# Altium PCB PCB1.PcbDoc
Units mm, origin at the board's own origin, x right, y up, seen from the top; angles counter-clockwise.
Board outline 44.96 x 16.26 mm, 2 copper layers (Top Layer, Bottom Layer); 18 components, 8 nets, 40 pads, 0 vias.
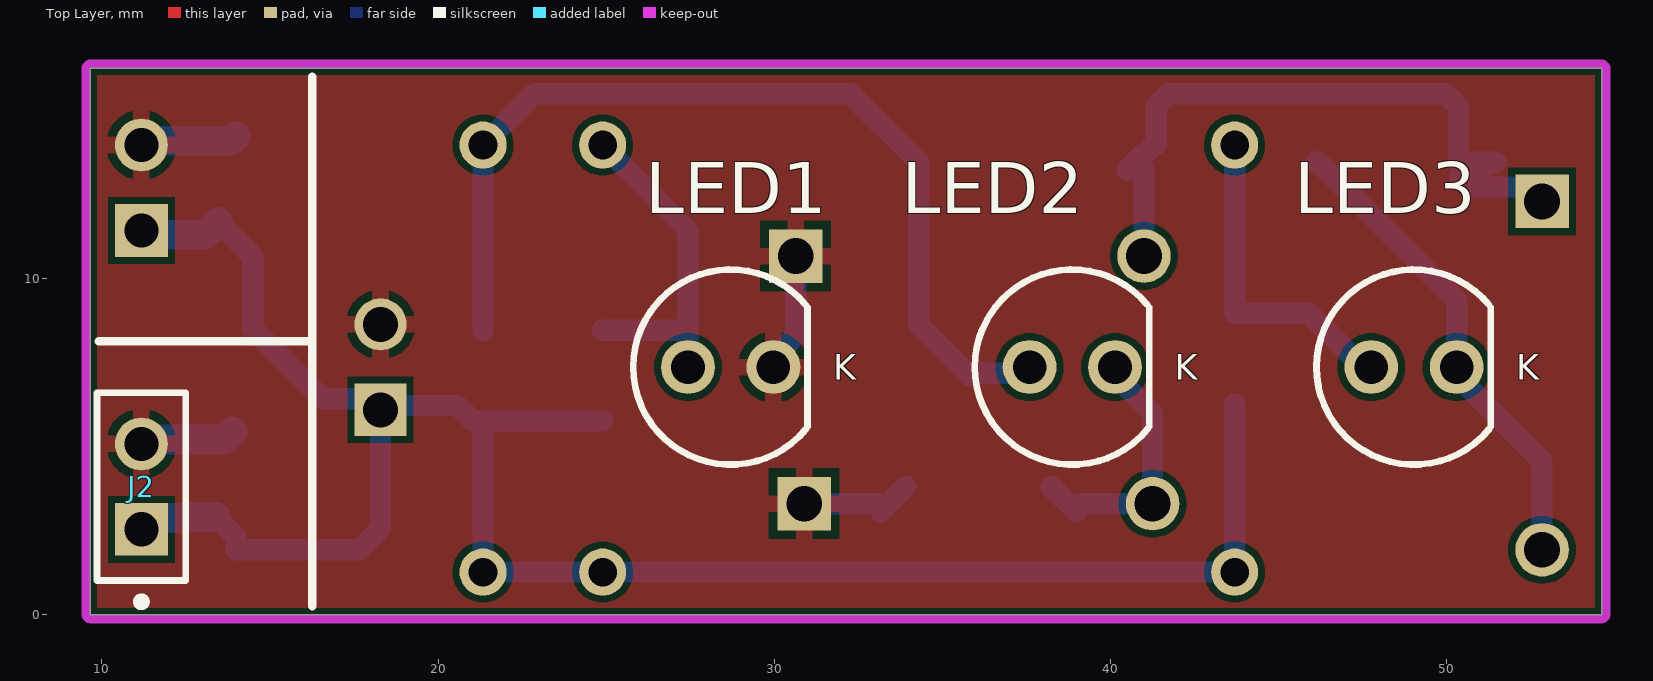
[diagram p0: Top Layer view]
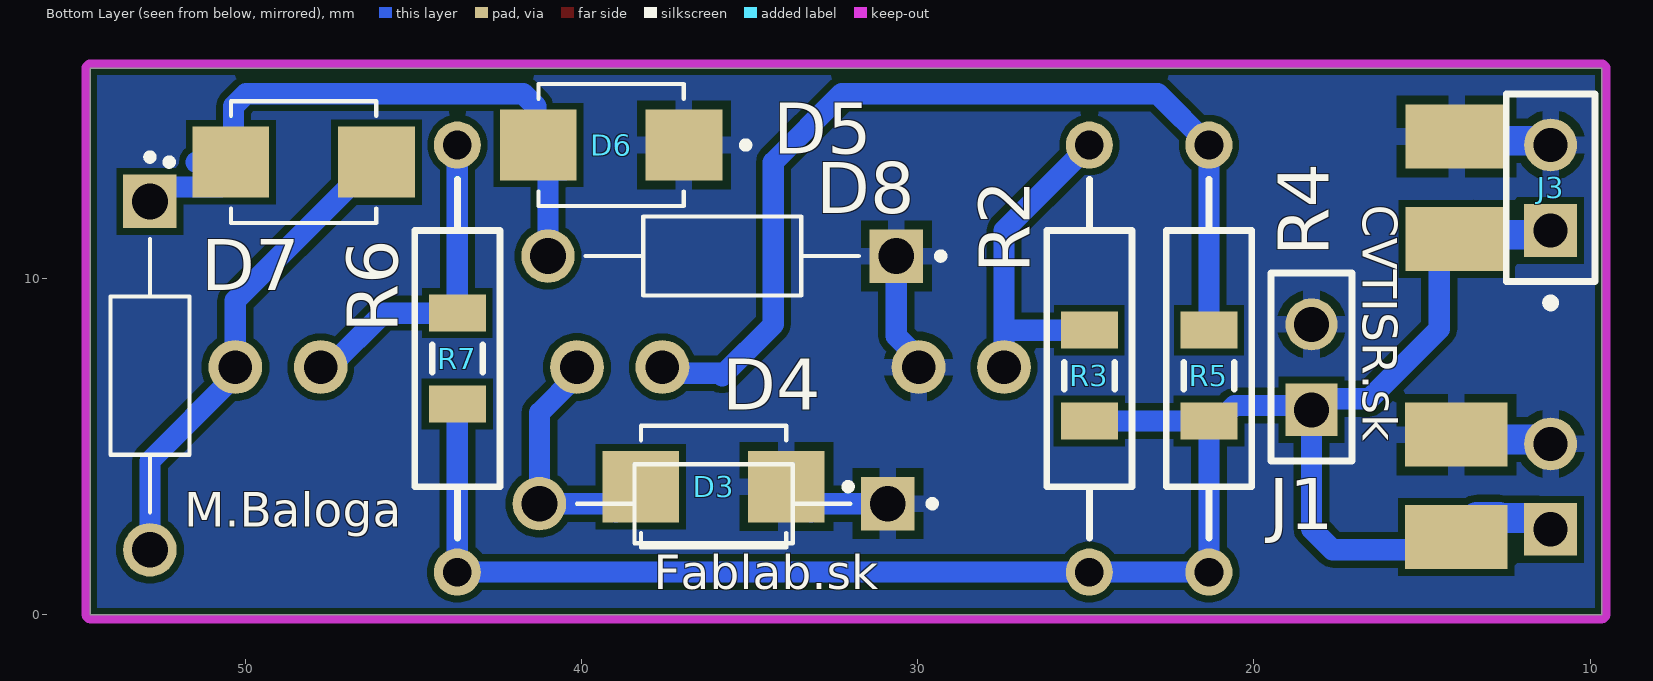
[diagram p1: Bottom Layer view, seen from below]
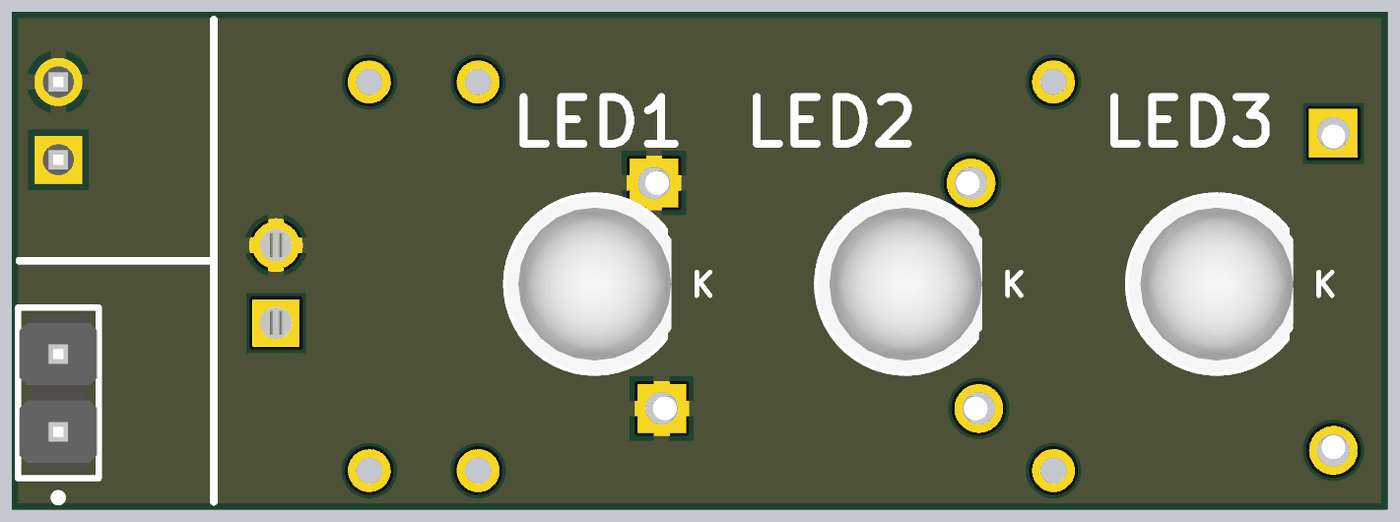
[diagram p2: 3D render of the assembled board from above, using the file's embedded part models]
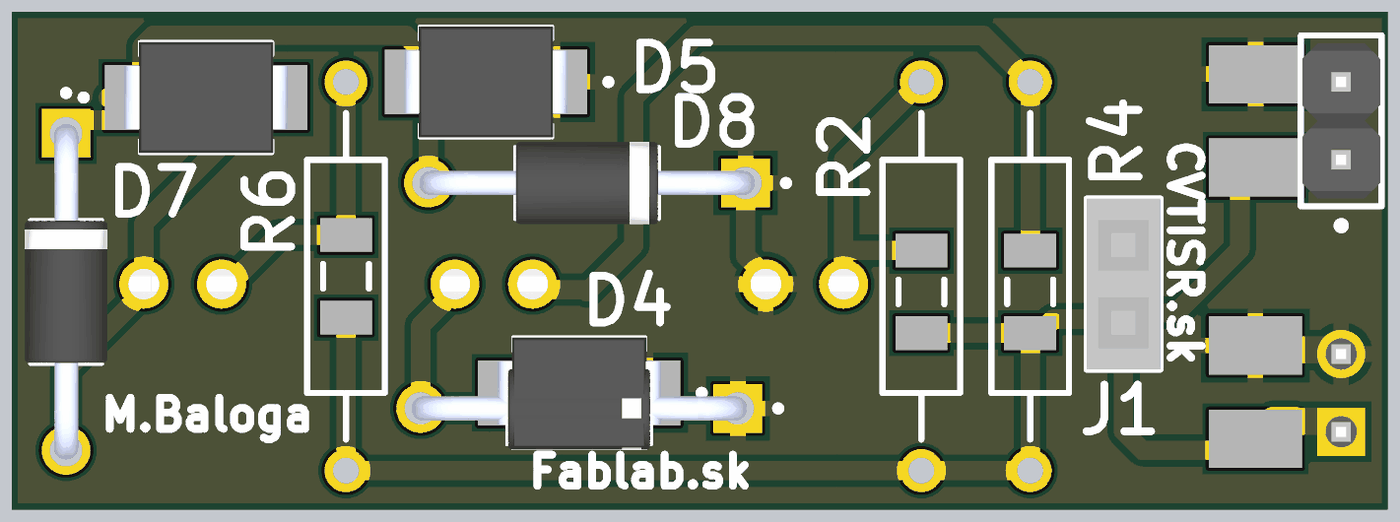
[diagram p3: 3D render of the assembled board from below, using the file's embedded part models]

## Layer stack, top to bottom
Top Solder: solder mask 0.0102, Solder Resist, Dk 3.5
Top Layer: signal copper 0.0356
Dielectric 1: dielectric 0.32, FR-4, Dk 4.8
Bottom Layer: signal copper 0.0356
Bottom Solder: solder mask 0.0102, Solder Resist, Dk 3.5

## Board outline
9.652,0 54.61,0 54.61,16.256 9.652,16.256

## Design rules (kind name [scope] priority, off if disabled: settings)
BoardOutlineClearance [All] p1: gap=0.2 ignorepadtopadclearanceinfootprint=FALSE except(0.4: Arc-SplitBarrior Arc-SplitContinuation Track-SplitBarrior Track-SplitContinuation SMDPad-SplitBarrior SMDPad-SplitContinuation THPad-SplitBarrior THPad-SplitContinuation Via-SplitBarrior Via-SplitContinuation Fill-SplitBarrior Fill-SplitContinuation Poly-SplitBarrior Poly-SplitContinuation Region-SplitBarrior Region-SplitContinuation Text-SplitBarrior Text-SplitContinuation)
Clearance "Clearance Bottom Layer" [OnLayer('Bottom Layer')] p1: gap=0.203 ignorepadtopadclearanceinfootprint=TRUE except(0.254: Arc-Text Track-Text SMDPad-Text THPad-Text Via-Text Fill-Text Poly-Text Region-Text Text-Text)
Clearance "Clearance Top Layer" [OnLayer('Top Layer')] p2: gap=0.203 ignorepadtopadclearanceinfootprint=TRUE except(0.254: Arc-Text Track-Text SMDPad-Text THPad-Text Via-Text Fill-Text Poly-Text Region-Text Text-Text)
Clearance [All] p3: gap=0.2 ignorepadtopadclearanceinfootprint=FALSE except(0.089: Arc-Arc Arc-Track Arc-SMDPad Track-Track Track-SMDPad SMDPad-SMDPad; 0.127: Arc-Via Track-Via SMDPad-Via THPad-Via Via-Via; 0.254: Arc-Text Track-Text SMDPad-Text THPad-Text Via-Text Fill-Text Poly-Text Region-Text Text-Text)
HoleSize [All] p1: absolutevalues=TRUE maxlimit=6.3 minlimit=0.2 maxpercent=80.000 minpercent=20.000
MinimumAnnularRing [All] p1: minimumring=0.076
MinimumSolderMaskSliver [All] p1: minsoldermaskwidth=0.1
PolygonConnect PolygonConnect_1 [All] p1: thpad.connectstyle=Relief thpad.reliefconductorwidth=0.508 thpad.reliefentries=4 thpad.polygonreliefangle="90 Angle" thpad.airgapwidth=0.254 smdpad.connectstyle=Relief smdpad.reliefconductorwidth=0.508 smdpad.reliefentries=4 smdpad.polygonreliefangle="90 Angle" smdpad.airgapwidth=0.254 via.connectstyle=Direct via.reliefconductorwidth=0.508 via.reliefentries=4 via.polygonreliefangle="90 Angle" via.airgapwidth=0.254
RoutingCorners [All] p1: cornerstyle=Round minsetback=2.54 maxsetback=2.54
RoutingVias [All] p1: holewidth=0.5 width=1 viastyle="Through Hole" minholewidth=0.2 minwidth=0.45 maxholewidth=1 maxwidth=2
SilkToSilkClearance [All] p1: silktosilkclearance=0.1
SilkToSolderMaskClearance [IsPad] p1: minsilkscreentomaskgap=0.1 clearancetoexposedcopper=TRUE
SolderMaskExpansion [All] p1: expansion=0.102 istentingtop=FALSE
Width [All] p1: maxlimit=2.54 minlimit=0.089 preferedwidth=0.381
25 further rules are at their usual default settings.

## Components (designator, comment, footprint, x,y, rotation, side; value= is the part's Value field where it differs from the comment)
D3 "S1BB" DIOM4336X265N 36.068,3.81 r0 bottom
D4 "1N4007G" DIOAD1036W78L470D235 36.068,3.302 r0 bottom
D5 "S1BB" DIOM4336X265N 48.26,13.462 r180 bottom
D6 "S1BB" DIOM4336X265N 39.116,13.97 r0 bottom
D7 "1N4007G" DIOAD1036W78L470D235 52.832,7.112 r270 bottom
D8 "1N4007G" DIOAD1036W78L470D235 35.814,10.668 r0 bottom
J1 "SSW-102-02-G-S" SMTC-SSW-102-02-X-S 18.288,6.096 r90 bottom
J2 "M20-9990246" FP-M20-9990246-MFG 11.176,3.81 r90 top
J3 "M20-9990246" FP-M20-9990246-MFG 11.176,12.7 r90 bottom
LED1 "151051RS11000" "Type 5mm" 28.702,7.366 r0 top
LED2 "151051RS11000" "Type 5mm" 38.862,7.366 r0 top
LED3 "151051RS11000" "Type 5mm" 49.022,7.366 r0 top
R2 "Res2" AXIAL-0.5 24.892,7.62 r90 bottom value=1K
R3 "Res2" C1206 24.892,7.112 r90 bottom value=1K
R4 "Res2" AXIAL-0.5 21.336,7.62 r90 bottom value=1K
R5 "Res2" C1206 21.336,7.112 r90 bottom value=1K
R6 "Res2" AXIAL-0.5 43.688,7.62 r90 bottom value=1K
R7 "Res2" C1206 43.688,7.62 r90 bottom value=1K

## Footprints (in the part's own frame and the unit in brackets; to place one, negate y for a bottom-side part, rotate by r counter-clockwise, add the part's x,y. Pads: shape width x height; smd on the part's side, far side on the other; paste and mask are expansions set on the pad)
AXIAL-0.5 [mm] "Axial Device, Thru-Hole; 2 Leads; 0.5 in Pin Spacing"
  round 1.4 hole 0.85: 1(-6.35,0) 2(6.35,0)
  silkscreen extent -5.33,-1.27 5.33,1.27
C1206 [mm] "Chip Capacitor, Body 3.2x1.6mm, IPC High Density"
  rect 1.1x1.7 smd: 1(-1.35,0) 2(1.35,0)
  silkscreen extent -0.4,-0.75 0.4,0.75, body extent -1.7,-0.9 1.7,0.9, height 1.3
DIOAD1036W78L470D235 [mm]
  round 1.59 hole 1.06: A(5.18,0)
  rect 1.59x1.59 hole 1.06: C(-5.18,0)
  silkscreen extent -6.6,-1.17 4.07,1.17, body extent -5.47,-1.35 5.47,1.35, height 2.69
DIOM4336X265N [mm]
  rect 2.28x2.12 smd: A(2.165,0) C(-2.165,0)
  silkscreen extent -4.1,-1.81 2.16,1.81, body extent -2.67,-1.81 2.67,1.81, height 2.65
FP-M20-9990246-MFG [mm]
  rect 1.57x1.57 hole 1.02 paste-1000 mask+0: 1(-1.27,0)
  round 1.57 hole 1.02 paste-1000 mask+0: 2(1.27,0)
  silkscreen extent -3.55,-1.32 2.79,1.32, body extent -2.89,-1.42 2.89,1.42, height 0.25
SMTC-SSW-102-02-X-S [mm] "SQ Post Socket, 1x2 Pins, Vertical, 2.54mm Pitch, Female"
  rect 1.55x1.55 hole 1.04: 1(0,0)
  round 1.55 hole 1.04: 2(2.54,0)
  silkscreen extent -1.53,-1.2 4.07,1.2, body extent -1.52,-1.21 4.06,1.21, height 8.51
"Type 5mm" [mm] "THT, LED-5mm, 2pin- Body 5.8mm"
  round 1.6 hole 1: 1(1.27,0) 2(-1.27,0)
  silkscreen extent -2.9,-2.9 2.29,2.9, body extent -2.9,-2.9 2.5,2.9, height 11.7

## Part data
D3 D4 D5 D6 D7 D8: Package=None, Availability=Unavailable, Price=None
  D3 D5 D6: MF="{'manufacturer': u'Taiwan Semiconductor'}", MP=S1BB
  D4 D7 D8: MF="{'manufacturer': u'ON Semiconductor'}", MP=1N4007G
J1: library part CMP-1023-00324-1, "SQ Post Socket, Through-hole, Vertical, -55 to 125 degC, 2.54 mm Pitch, 2-Pin, Female, RoHS", Manufacturer=Samtec, Temperature Range="-55 to 125 degC", ComponentLink1Description="Manufacturer URL", ComponentLink1URL=http://www.samtec.com, ComponentLink2Description=Datasheet, ComponentLink2URL=http://www.samtec.com/documents/webfiles/pdf/SSW_TH.PDF, ComponentLink3Description="Package Specification", ComponentLink3URL=http://www.samtec.com/documents/webfiles/cpdf/SSW-1XX-XX-XXX-X-XX-XXX-XX-MKT.pdf, DatasheetVersion=F-214, Mounting Technology=Through-hole, Orientation=Vertical, PackageDescription="Assembly, Socket Strip .016 X .031 Tail", PackageReference=SSW-102-02-X-S, PackageVersion="CA, 6/1987", PartNumber=SSW-102-02-G-S, Pitch="2.54 mm", RoHS=True
J2 J3: library part CMP-15831-000009-1, "CONN HEADER VERT 2POS 2.54MM", Current Rating=3A, Manufacturer=Harwin, Temperature="-40°C to +105°C", Temperature Range High=+105°C, Temperature Range Low=-40°C, Automotive=No, Category=Conn, ComponentLink2Description=Datasheet, ComponentLink2URL=https://cdn.harwin.com/pdfs/M20-999.pdf, Conn Gender=Male, Conn Orientation=Vertical, Contact Material=Tin,Nickel, Device Class L1=Connectors, Device Class L2="Headers and Wire Housings", Device Class L3=unset, Digikey Description="CONN HEADER VERT 2POS 2.54MM", Height=8.99mm, Lead Free=Yes, Manufacturer Part Number=M20-9990246, Mouser Description="2.54mm (0.1\") Pitch SIL Vertical PC Tail Pin Header, 6.1mm mating pin height, tin, 2 contacts", Number Of Contacts=2, Number Of Rows=1, Octopart=https://octopart.com/m20-9990246-harwin-2590635, Package=M20-9990246, Pitch=2.54mm, RoHS=TRUE
LED1 LED2 LED3: library part CMP-1488-00008-1, "THT LED round mono-color color lens, WL-TMRW, Red", Emitting color=Red, Manufacturer="Wuerth Elektronik", ComponentLink1Description="Manufacturer URL", ComponentLink1URL=http://www.we-online.com, ComponentLink2Description=Datasheet, ComponentLink2URL=http://katalog.we-online.de/pbs/datasheet/7448042001.pdfhttp://katalog.we-online.de/pbs/datasheet/7448042001.pdfhttp://katalog.we-online.de/pbs/datasheet/7448042001.pdfhttp://katalog.we-online.de/pbs/datasheet/151051RS11000.pdf, PackageReference="Type 5mm", PartNumber=151051RS11000
R2 R3 R4 R5 R6 R7: "Resistor", LatestRevisionDate=17-Jul-2002, LatestRevisionNote="Re-released for DXP Platform.", PackageDescription="Axial Device, Thru-Hole; 2 Leads; 0.4 in Pin Spacing", PackageReference=AXIAL-0.4, Published=8-Jun-2000, Publisher="Altium Limited"

## Free pads (board coordinates)
  rect 3.048x1.905 smd far side: 5(13.97,11.176) 5(13.97,14.224) 5(13.98,2.311) 5(13.98,5.359)

## Nets (pads, with @x,y where several pads share a name; then routed paths per layer and width w, separated by ;. In a path a pad name is that pad's centre, name@x,y a point inside that pad or via, vN(x,y) a via of type N, cw(c..) or ccw(c..) an arc to the next point about the centre after c; other vN are vias at no path point)
GND: D3.C D4.C D6.C D8.C J1.2 J2.2 J3.2 LED1.1 pad.5@13.97,14.224 pad.5@13.98,5.359 | length 13
  Bottom Layer w0.635: pad.5@13.886,5.453 pad.5@13.98,5.359 ; LED1.1 29.972,7.627 30.634,8.289 D8.C ; D4.C 33.081,3.302 33.161,3.222 33.161,3.067 D3.C
  Bottom Layer w0.889: J2.2 11.306,5.21 13.643,5.21 pad.5@13.886,5.453 ; J3.2 11.303,14.097 13.843,14.097 pad.5@13.97,14.224
NetD3_A: D3.A D4.A LED2.1 | length 8
  Bottom Layer w0.635: D3.A 38.975,3.067 38.975,3.222 39.055,3.302 D4.A 41.248,6.004 40.132,7.12 LED2.1
NetD5_A: D5.A D7.A LED3.1 | length 14.4
  Bottom Layer w0.635: D5.A 46.175,13.462 50.292,9.345 LED3.1 50.292,7.112 52.832,4.572 D7.A
NetD5_C: D5.C D6.A D7.C D8.A | length 21.3
  Bottom Layer w0.635: D8.A 40.994,13.227 40.486,13.227 40.942,13.683 40.994,13.683 D6.A ; D6.A@41.361,13.97 41.361,15.126 41.733,15.498 49.973,15.498 50.345,15.126 50.345,13.462 51.451,13.462 50.383,13.064 50.728,12.719 52.405,12.719 D7.C
NetLED1_2: LED1.2 R2.2 R3.2 | length 10.2
  Bottom Layer w0.635: R3.2 27.352,8.462 27.432,8.382 ; R2.2 27.432,11.43 27.432,8.382 ; LED1.2 27.432,8.382
NetLED2_2: LED2.2 R4.2 R5.2 | length 28.8
  Bottom Layer w0.635: R5.2 R4.2 22.86,15.494 32.258,15.494 34.29,13.462 34.29,8.636 35.814,7.112 35.883,7.181 37.407,7.181 LED2.2
NetLED3_2: LED3.2 R6.2 R7.2 | length 10
  Top Layer w0.635: LED3.2@47.491,7.366 LED3.2
  Bottom Layer w0.635: R6.2 R7.2 45.894,8.97 47.498,7.366 LED3.2
VCC: J1.1 J2.1 J3.1 pad.5@13.97,11.176 pad.5@13.98,2.311 R2.1 R3.1 R4.1 R5.1 R6.1 R7.1 | length 60.9
  Bottom Layer w0.635: pad.5@13.378,2.913 pad.5@13.98,2.311 ; pad.5@13.462,11.684 14.487,10.659 14.487,8.5 16.561,6.426 17.958,6.426 J1.1 ; pad.5@13.98,1.93 17.662,1.93 18.288,2.556 J1.1 ; R3.1 R5.1 ; R7.1 R6.1 R2.1 R4.1 R5.1 ; J1.1 18.415,6.223 20.575,6.223 21.036,5.762 R5.1
  Bottom Layer w0.889: J2.1 11.516,2.88 12.662,2.88 12.694,2.913 pad.5@13.378,2.913 ; J3.1 11.303,11.303 13.081,11.303 pad.5@13.462,11.684

## Polygon pours and split planes (outlines as drawn)
GND on Bottom Layer "GND_L02_P003" (solid, pour order 3): 9.652,0 54.61,0 54.61,16.256 9.652,16.256
GND on Top Layer "GND_L01_P004" (solid, pour order 4): 9.652,0 54.61,0 54.61,16.256 9.652,16.256

## Keep-outs
Keep-Out Layer:
  lines w0.254: 9.525,0 ccw(c9.652,0) 9.652,-0.127 ; 9.525,0 ccw(c9.652,0) 9.652,-0.127 ; 9.525,0 9.525,16.256 ; 9.525,16.256 cw(c9.652,16.256) 9.652,16.383 ; 9.525,16.256 cw(c9.652,16.256) 9.652,16.383 ; 9.652,-0.127 54.61,-0.127 ; 9.652,16.383 54.61,16.383 ; 54.61,-0.127 ccw(c54.61,0) 54.737,0 ; 54.61,-0.127 ccw(c54.61,0) 54.737,0 ; 54.61,16.383 cw(c54.61,16.256) 54.737,16.256 ; 54.61,16.383 cw(c54.61,16.256) 54.737,16.256 ; 54.737,0 54.737,16.256

## Silkscreen, mask and mechanical layers (free items; w line width, h text height)
Top Overlay:
  lines w0.254: 9.906,8.128 16.256,8.128 ; 16.256,0.254 16.256,16.002
Bottom Overlay:
  text "CVTISR.sk" at 16.764,12.192 h1.02 r90
  text "M.Baloga" at 51.816,2.625 h1.02
  text "Fablab.sk" at 37.846,0.762 h1.02

## Text inside footprints (layer, text, board x,y; h text height)
LED1: Top Overlay "K" at 31.75,6.985 h0.76; Mechanical 15 "K" at 31.75,6.985 h0.76
LED2: Top Overlay "K" at 41.91,6.985 h0.76; Mechanical 15 "K" at 41.91,6.985 h0.76
LED3: Top Overlay "K" at 52.07,6.985 h0.76; Mechanical 15 "K" at 52.07,6.985 h0.76